# Altium PCB Breadboard_Pot.PcbDoc
Units mm, origin at the board's own origin, x right, y up, seen from the top; angles counter-clockwise.
Board outline 12.7 x 21.59 mm, 2 copper layers (Top Layer, Bottom Layer); 5 components, 3 nets, 17 pads, 0 vias.
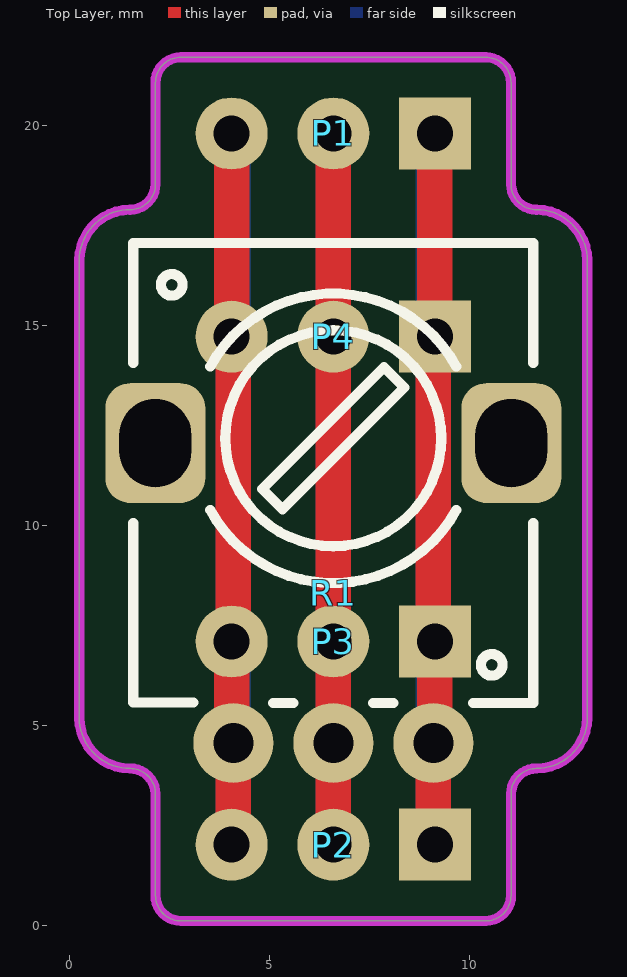
[diagram p0: Top Layer view]
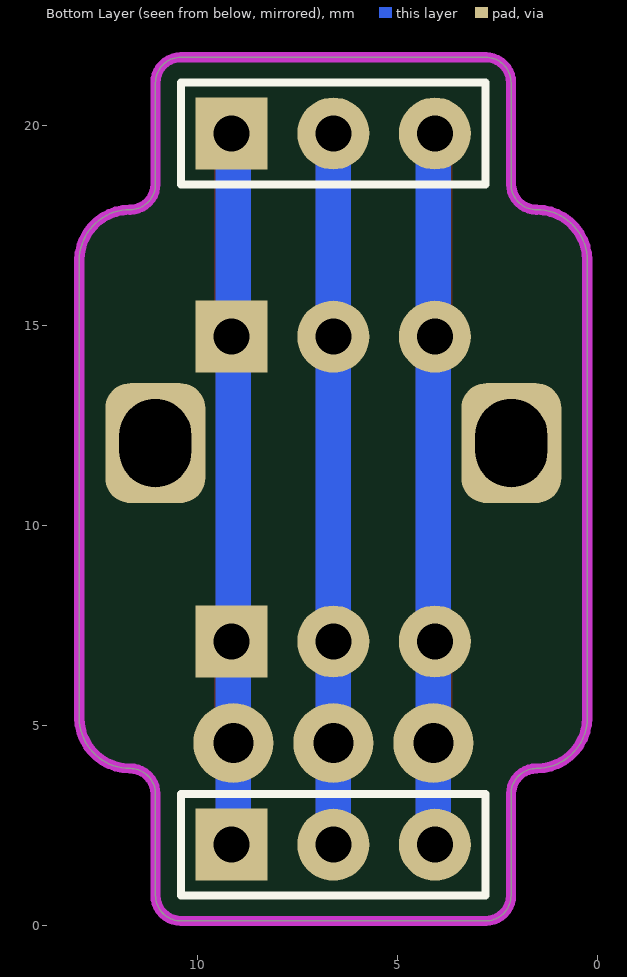
[diagram p1: Bottom Layer view, seen from below]

## Layer stack, top to bottom
Top Solder: solder mask 0.0102, Solder Resist, Dk 3.5
Top Layer: signal copper 0.0356
Dielectric 1: dielectric 0.32, FR-4, Dk 4.8
Bottom Layer: signal copper 0.0356
Bottom Solder: solder mask 0.0102, Solder Resist, Dk 3.5

## Board outline
2.159,0.762 2.159,3.302 ccw(c1.524,3.302) 1.524,3.937 cw(c1.524,5.207) 0.254,5.207 0.254,16.637 cw(c1.524,16.637) 1.524,17.907 ccw(c1.524,18.542) 2.159,18.542 2.159,21.082 cw(c2.794,21.082) 2.794,21.717 10.414,21.717 cw(c10.414,21.082) 11.049,21.082 11.049,18.542 ccw(c11.684,18.542) 11.684,17.907 cw(c11.684,16.637) 12.954,16.637 12.954,5.207 cw(c11.684,5.207) 11.684,3.937 ccw(c11.684,3.302) 11.049,3.302 11.049,0.762 cw(c10.414,0.762) 10.414,0.127 2.794,0.127 cw(c2.794,0.762)

## Design rules (kind name [scope] priority, off if disabled: settings)
Clearance [All] p1: gap=0.254 ignorepadtopadclearanceinfootprint=FALSE except(0: Arc-Hole Track-Hole SMDPad-Hole THPad-Hole Via-Hole Fill-Hole Poly-Hole Region-Hole Text-Hole)
PolygonConnect [All] p1: connectstyle=Relief reliefconductorwidth=0.254 reliefentries=4 polygonreliefangle="90 Angle" airgapwidth=0.254
RoutingVias [All] p1: holewidth=0.711 width=1.27 viastyle="Through Hole" minholewidth=0.711 minwidth=1.27 maxholewidth=0.711 maxwidth=1.27
SolderMaskExpansion [All] p1: expansion=0.102
Width [All] p1: maxlimit=1.27 minlimit=0.254 preferedwidth=0.889 minimp=50.000000 maximp=50.000000 favimp=50.000000
30 further rules are at their usual default settings.

## Components (designator, comment, footprint, x,y, rotation, side; value= is the part's Value field where it differs from the comment)
P1 "Header 3" HDR1X3 9.144,19.812 r180 top
P2 "Header 3" HDR1X3 9.144,2.032 r180 top
P3 "Header 3" HDR1X3 9.144,7.112 r180 top
P4 "Header 3" HDR1X3 9.144,14.732 r180 top
R1 "50k" RV09 6.604,4.572 r0 top

## Footprints (in the part's own frame and the unit in brackets; to place one, negate y for a bottom-side part, rotate by r counter-clockwise, add the part's x,y. Pads: shape width x height; smd on the part's side, far side on the other; paste and mask are expansions set on the pad)
HDR1X3 [mm] "Connector; Header; 3 Position"
  rect 1.8x1.8 hole 0.9: 1(0,0)
  round 1.8 hole 0.9: 2(2.54,0) 3(5.08,0)
  body extent -1.27,-1.27 6.35,1.27, height 7
RV09 [mm]
  round 2 hole 1: 1(-2.5,0) 2(0,0) 3(2.5,0)
  rrect50% 2.5x3 hole 1.8 slot 2.2 at 90 deg: ""(-4.45,7.5) ""(4.45,7.5)
  silkscreen extent -5,1 5,12.5, body extent -4.88,-0.1 4.88,12.45, height 20

## Part data
P1 P2 P3 P4: "Header, 3-Pin", LatestRevisionDate=17-Jul-2002, LatestRevisionNote="Re-released for DXP Platform.", Publisher="Altium Limited"
R1: library part POT

## Nets (pads, with @x,y where several pads share a name; then routed paths per layer and width w, separated by ;. In a path a pad name is that pad's centre, name@x,y a point inside that pad or via, vN(x,y) a via of type N, cw(c..) or ccw(c..) an arc to the next point about the centre after c; other vN are vias at no path point)
1: P1.3 P2.3 P3.3 P4.3 R1.1 | length 35.8
  Top Layer w0.889: P2.3 4.104,2.072 R1.1 4.064,4.532 P3.3 4.102,7.112 4.102,14.694 P4.3 P1.3
  Bottom Layer w0.889: P2.3 4.102,2.032 4.102,19.774 P1.3
2: P1.2 P2.2 P3.2 P4.2 R1.2 | length 35.6
  Top Layer w0.889: P2.2 R1.2 P3.2 P4.2 P1.2
  Bottom Layer w0.889: P2.2 R1.2 P3.2 P4.2 P1.2
3: P1.1 P2.1 P3.1 P4.1 R1.3 | length 35.8
  Top Layer w0.889: P2.1 9.104,2.072 R1.3 9.144,4.532 P3.1 9.106,7.112 9.106,14.694 P4.1 P1.1
  Bottom Layer w0.889: P2.1 9.106,2.032 9.106,19.774 P1.1
pads on no net: R1.

## Keep-outs
Keep-Out Layer:
  lines w0.254: 0.254,5.207 ccw(c1.524,5.207) 1.524,3.937 cw(c1.524,3.302) 2.159,3.302 2.159,0.762 ccw(c2.794,0.762) 2.794,0.127 3.429,0.127 9.779,0.127 10.414,0.127 ccw(c10.414,0.762) 11.049,0.762 11.049,3.302 cw(c11.684,3.302) 11.684,3.937 ccw(c11.684,5.207) 12.954,5.207 12.954,16.637 ccw(c11.684,16.637) 11.684,17.907 cw(c11.684,18.542) 11.049,18.542 11.049,21.082 ccw(c10.414,21.082) 10.414,21.717 2.794,21.717 ccw(c2.794,21.082) 2.159,21.082 2.159,18.542 cw(c1.524,18.542) 1.524,17.907 ccw(c1.524,16.637) 0.254,16.637 0.254,5.207